# Altium PCB PCB1.PcbDoc
Units mil, origin at the board's own origin, x right, y up, seen from the top; angles counter-clockwise.
Board outline 6000 x 4000 mil, 2 copper layers (Top Layer, Bottom Layer); 3 components, 3 nets, 46 pads, 0 vias.
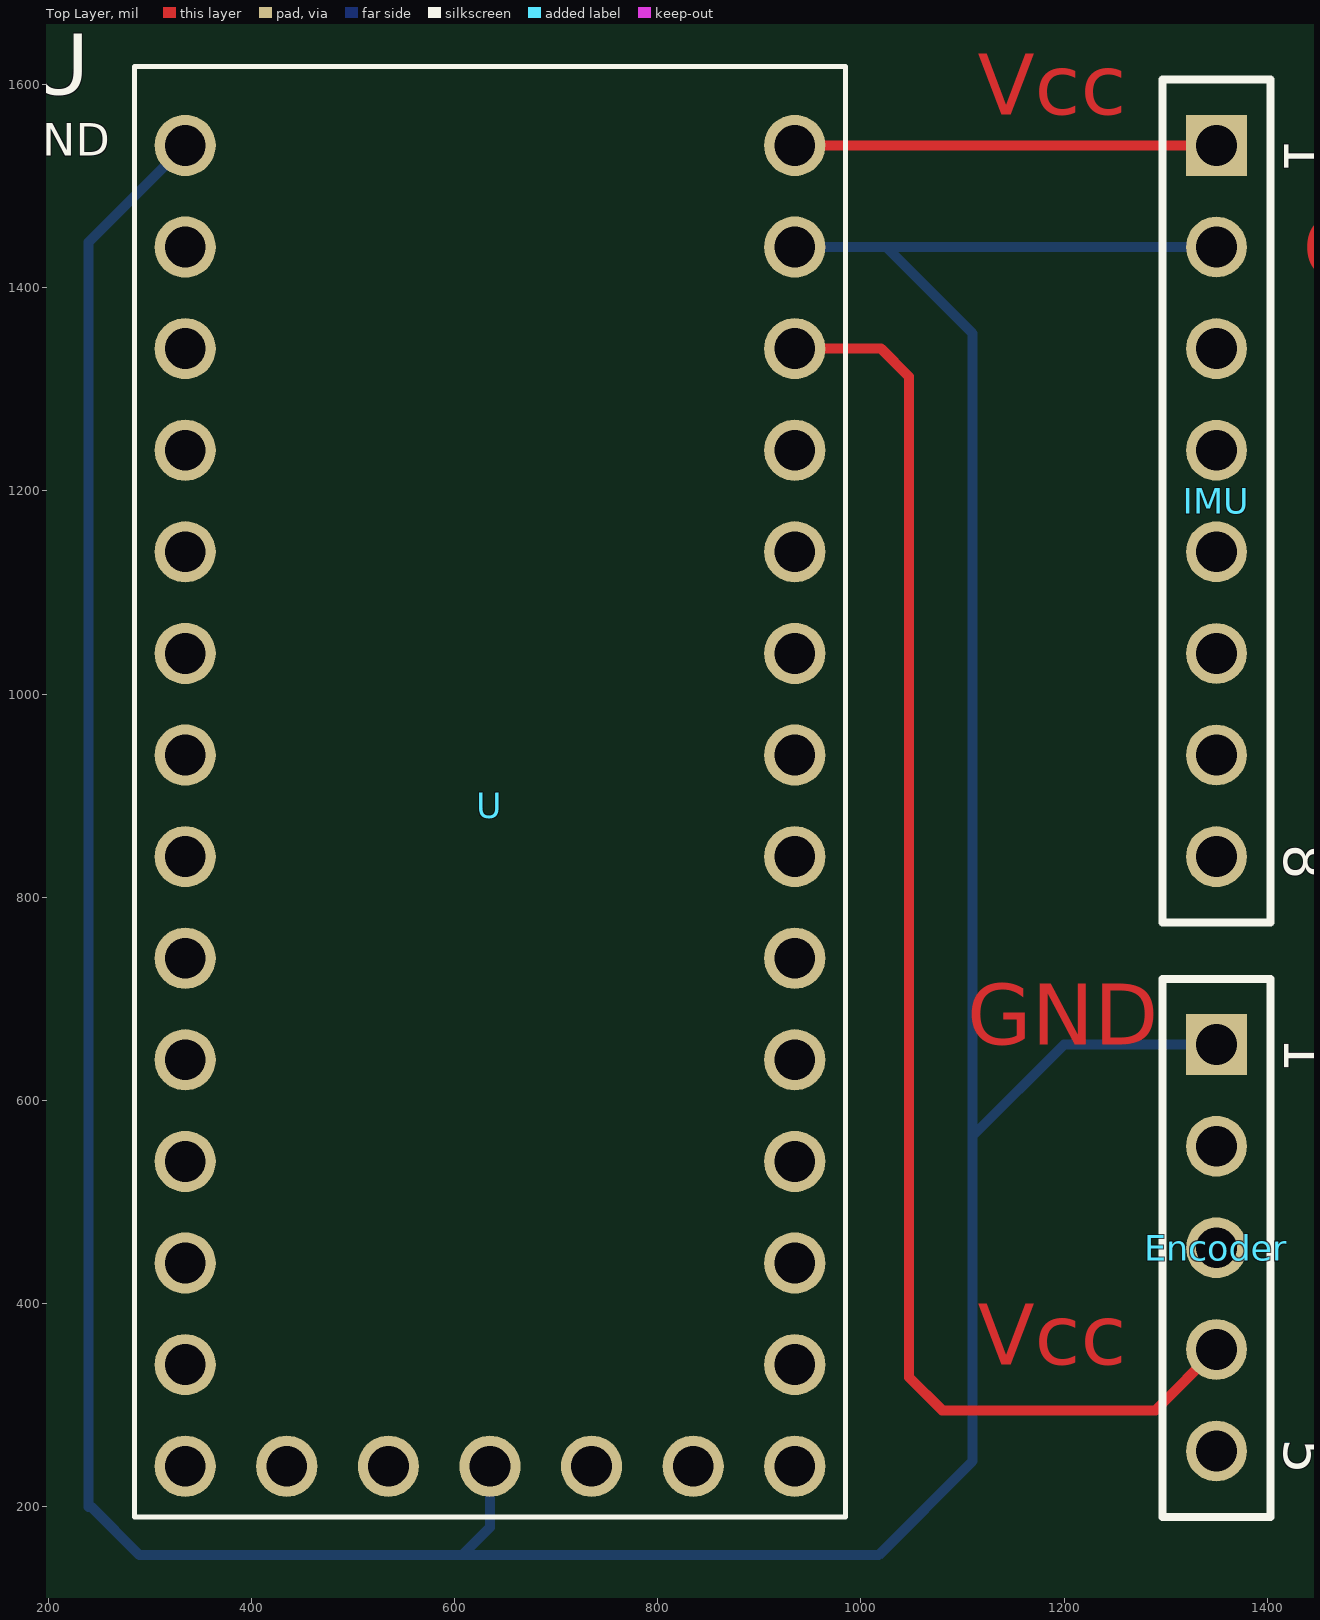
[diagram p0: Top Layer view]
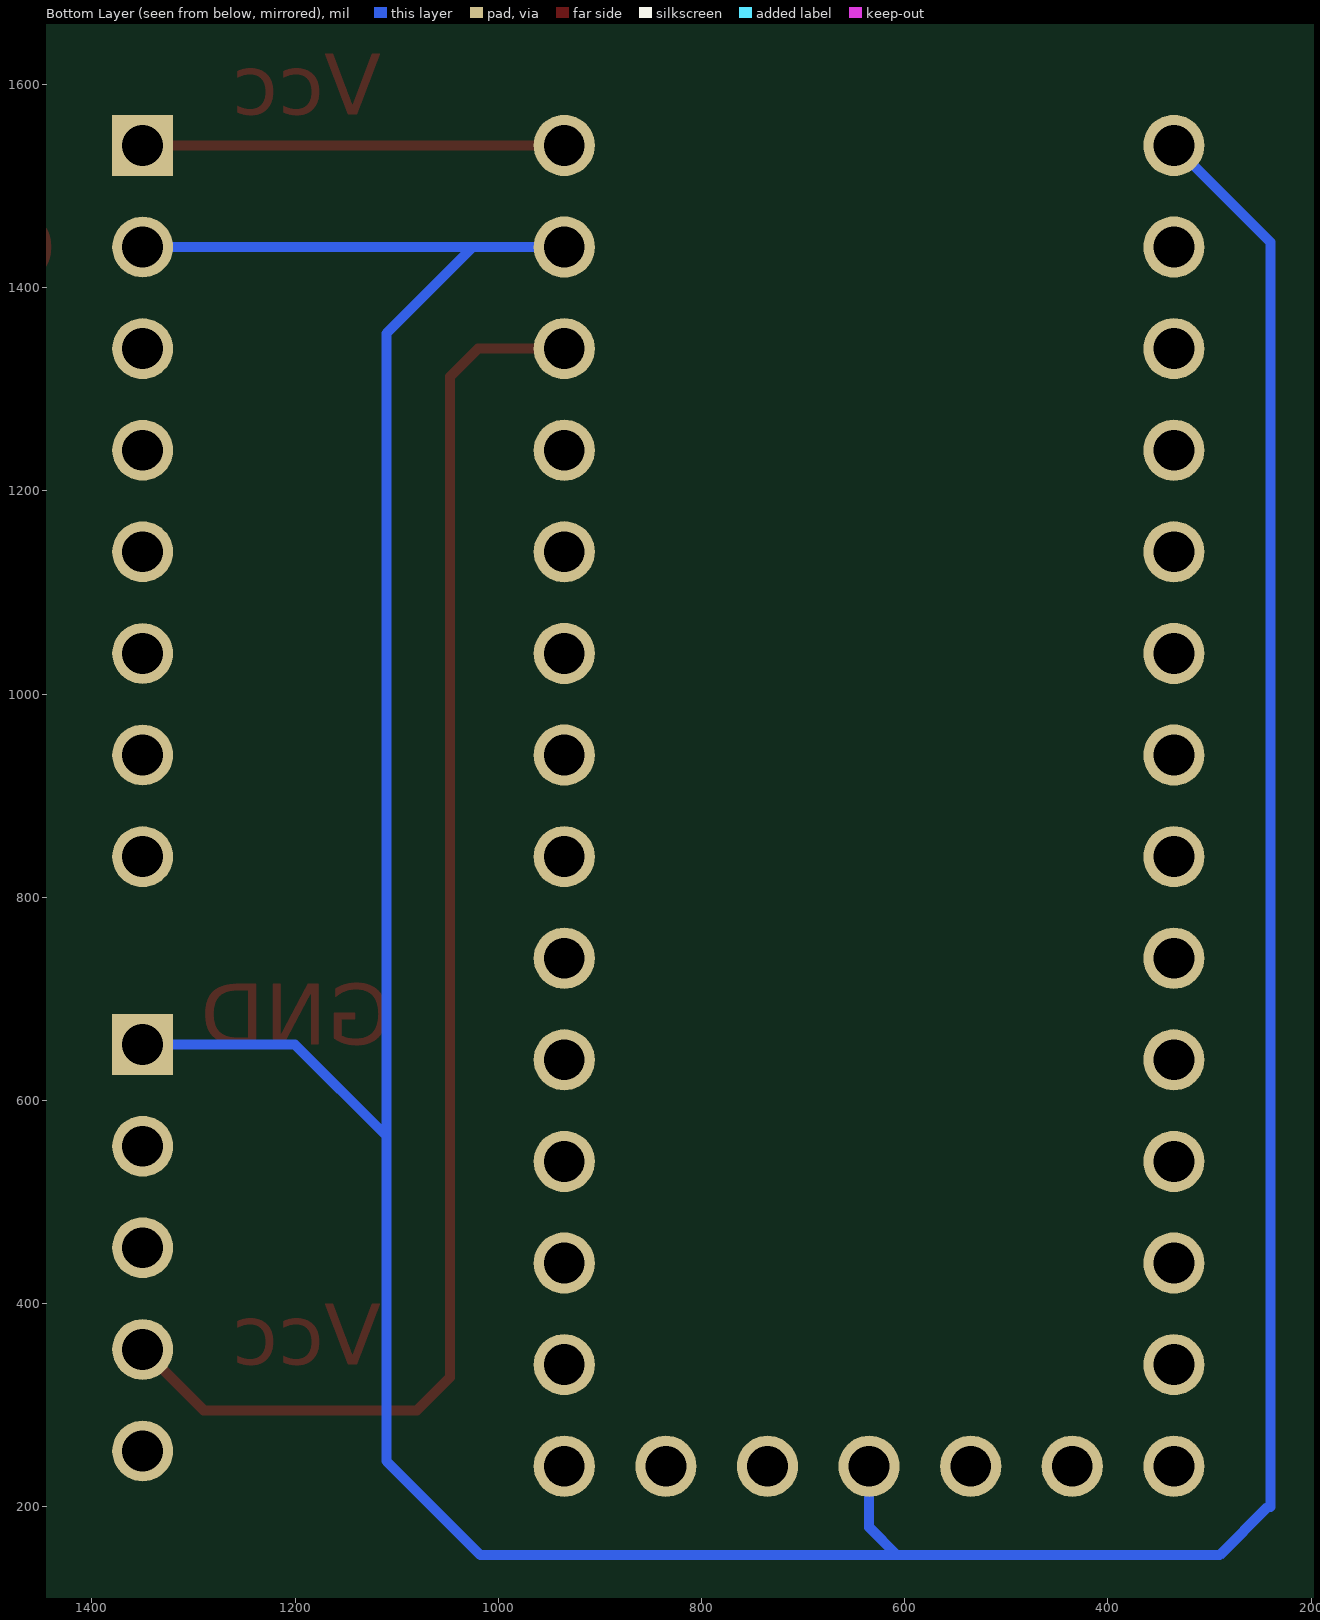
[diagram p1: Bottom Layer view, seen from below]

## Layer stack, top to bottom
Top Solder: solder mask 0.4, Solder Resist, Dk 3.5
Top Layer: signal copper 1.4
Dielectric 1: dielectric 12.6, FR-4, Dk 4.8
Bottom Layer: signal copper 1.4
Bottom Solder: solder mask 0.4, Solder Resist, Dk 3.5

## Board outline
0,-5 6000,-5 6000,3995 0,3995

## Design rules (kind name [scope] priority, off if disabled: settings)
Clearance [All] p1: gap=10 ignorepadtopadclearanceinfootprint=FALSE except(0: Arc-Hole Track-Hole SMDPad-Hole THPad-Hole Via-Hole Fill-Hole Poly-Hole Region-Hole Text-Hole)
PolygonConnect [All] p1: connectstyle=Relief reliefconductorwidth=10 reliefentries=4 polygonreliefangle="90 Angle" airgapwidth=10
RoomDefinition Sheet1 [InComponentClass('Sheet1')] p1: confinementstyle=ConfineIn formatcopy=TRUE lockcomponents=FALSE outline -1000,-1005 1000,-1005 1000,-5 -1000,-5
RoutingVias [All] p1: holewidth=28 width=50 viastyle="Through Hole" minholewidth=28 minwidth=50 maxholewidth=28 maxwidth=50
SolderMaskExpansion [All] p1: expansion=4
Width [All] p1: maxlimit=10 minlimit=10 preferedwidth=10
30 further rules are at their usual default settings.

## Components (designator, comment, footprint, x,y, rotation, side; value= is the part's Value field where it differs from the comment)
Encoder "61300511821" 61300511821 1350,455 r270 top (schematic designator PEncoder)
IMU "61300811821" 61300811821 1350,1190 r270 top (schematic designator JIMU)
U "DEV-15583" MODULE_DEV-15583 635,890 r0 top

## Footprints (in the part's own frame and the unit in brackets; to place one, negate y for a bottom-side part, rotate by r counter-clockwise, add the part's x,y. Pads: shape width x height; smd on the part's side, far side on the other; paste and mask are expansions set on the pad)
61300511821 [mm] "Socket Header, Pitch 2.54 mm, THT, Vertical, single row, 5p"
  rect 1.52x1.52 hole 1.02: 1(-5.08,0)
  round 1.52 hole 1.02: 2(-2.54,0) 3(0,0) 4(2.54,0) 5(5.08,0)
  silkscreen extent -6.73,-1.35 6.73,1.35, body extent -6.6,-1.25 6.6,1.25, height 8.55
61300811821 [mm] "Socket Header, Pitch 2.54 mm, THT, Vertical, single row, 8p"
  rect 1.52x1.52 hole 1.02: 1(-8.89,0)
  round 1.52 hole 1.02: 2(-6.35,0) 3(-3.81,0) 4(-1.27,0) 5(1.27,0) 6(3.81,0) 7(6.35,0) 8(8.89,0)
  silkscreen extent -10.54,-1.35 10.54,1.35, body extent -10.41,-1.25 10.41,1.25, height 8.55
MODULE_DEV-15583 [mm]
  round 1.53 hole 1.02: 0(-7.62,13.97) 1(-7.62,11.43) 2(-7.62,8.89) 3(-7.62,6.35) 3.3V_1(-2.54,-16.51) 3.3V_2(7.62,11.43) 4(-7.62,3.81) 5(-7.62,1.27) 6(-7.62,-1.27) 7(-7.62,-3.81) 8(-7.62,-6.35) 9(-7.62,-8.89) 10(-7.62,-11.43) 11(-7.62,-13.97) 12(-7.62,-16.51) 13(7.62,-16.51) 14(7.62,-13.97) 15(7.62,-11.43) 16(7.62,-8.89) 17(7.62,-6.35) 18(7.62,-3.81) 19(7.62,-1.27) 20(7.62,1.27) 21(7.62,3.81) 22(7.62,6.35) 23(7.62,8.89) G1(-7.62,16.51) G2(0,-16.51) G3(7.62,13.97) ON-OFF(5.08,-16.51) PGM(2.54,-16.51) VBAT(-5.08,-16.51) VIN(7.62,16.51)
  silkscreen extent -8.89,-17.78 8.89,18.48

## Part data
Encoder: library part CMP-1502-01320-1, "THT Vertical Socket Header WR-PHD, Pitch 2.54 mm, Single Row, 5 pins", Contact Resistance=20mOhm, Manufacturer="Wurth Elektronik", Operating Temperature=-40to125degC, Rated Current=3A, Withstanding Voltage=500VAC, Working Voltage=250VAC, Datasheet URL=https://katalog.we-online.de/em/datasheet/6130xx11821.pdf, Gender=Female, Manufacturer URL=http://www.we-online.de, Mounting Technology=THT, Orientation=Vertical, Package Reference=61300511821, Packaging=Tray, Part Number=61300511821, Pin Number=5, Pitch=2.54mm, Publisher=WurthElektronik, Row Number=Single
IMU: library part CMP-1502-01327-1, "THT Vertical Socket Header WR-PHD, Pitch 2.54 mm, Single Row, 8 pins", Contact Resistance=20mOhm, Manufacturer="Wurth Elektronik", Operating Temperature=-40to125degC, Rated Current=3A, Withstanding Voltage=500VAC, Working Voltage=250VAC, Datasheet URL=https://katalog.we-online.de/em/datasheet/6130xx11821.pdf, Gender=Female, Manufacturer URL=http://www.we-online.de, Mounting Technology=THT, Orientation=Vertical, Package Reference=61300811821, Packaging=Tray, Part Number=61300811821, Pin Number=8, Pitch=2.54mm, Publisher=WurthElektronik, Row Number=Single
U: "RT1062 Teensy 4.0 i.MX ARM?? Cortex??-M7 MPU Embedded Evaluation Board", Package=None, Digi-Key_Part_Number=1568-DEV-15583-ND, Digi-Key_Purchase_URL=https://www.digikey.com/product-detail/en/sparkfun-electronics/DEV-15583/1568-DEV-15583-ND/10384551?utm_source=snapeda&utm_medium=aggregator&utm_campaign=symbol, MF="SparkFun Electronics", MP=DEV-15583, SnapEDA_Link=https://www.snapeda.com/parts/DEV-15583/SparkFun%20Electronics/view-part/4001229/?ref=snap

## Nets (pads, with @x,y where several pads share a name; then routed paths per layer and width w, separated by ;. In a path a pad name is that pad's centre, name@x,y a point inside that pad or via, vN(x,y) a via of type N, cw(c..) or ccw(c..) an arc to the next point about the centre after c; other vN are vias at no path point)
GND: Encoder.1 IMU.2 U.G1 U.G2 U.G3 | length 4328.7
  Bottom Layer w10: U.G1 240,1445 240,200 242.5,200 290,152.5 607.5,152.5 ; U.G2 635,180 607.5,152.5 ; U.G3 1025,1440 ; Encoder.1 1200,655 1110,565 ; IMU.2 1025,1440 ; 607.5,152.5 1017.5,152.5 1110,245 1110,565 ; 1025,1440 1110,1355 1110,565
NetJIMU_1: IMU.1 U.VIN | length 415
  Top Layer w10: U.VIN IMU.1
NetPEncoder_4: Encoder.4 U.3.3V_2 | length 1449.7
  Top Layer w10: U.3.3V_2 1020,1340 1047.5,1312.5 1047.5,327.5 1080,295 1290,295 Encoder.4
pads on no net: Encoder.2 Encoder.3 Encoder.5 IMU.3 IMU.4 IMU.5 IMU.6 IMU.7 IMU.8 U.0 U.1 U.2 U.3 U.3.3V_1 U.4 U.5 U.6 U.7 U.8 U.9 U.10 U.11 U.12 U.13 U.14 U.15 U.16 U.17 U.18 U.19 U.20 U.21 U.22 U.23 U.ON-OFF U.PGM U.VBAT

## Other copper
Top Layer:
  text "Vcc" at 1115,1570 h60
  text "GND" at 1435,1410 h60
  text "GND" at 1105,655 h60
  text "Vcc" at 1115,340 h60

## Text inside footprints (layer, text, board x,y; h text height)
Encoder: Top Overlay "1" at 1416.93,662.48 h40 r270; Top Overlay "5" at 1416.93,267.2 h40 r270
IMU: Top Overlay "8" at 1416.93,852.2 h40 r270; Top Overlay "1" at 1416.93,1547.48 h40 r270
U: Top Overlay "GND" at 160,1530 h32; Mechanical 13 "GND" at 160,1530 h32